# Altium PCB 2LED-ALUMBoard.PcbDoc
Units mm, origin at the board's own origin, x right, y up, seen from the top; angles counter-clockwise.
Board outline 35.1 x 49.8 mm, 2 copper layers (Top Layer, Bottom Layer); 6 components, 20 nets, 37 pads, 0 vias.
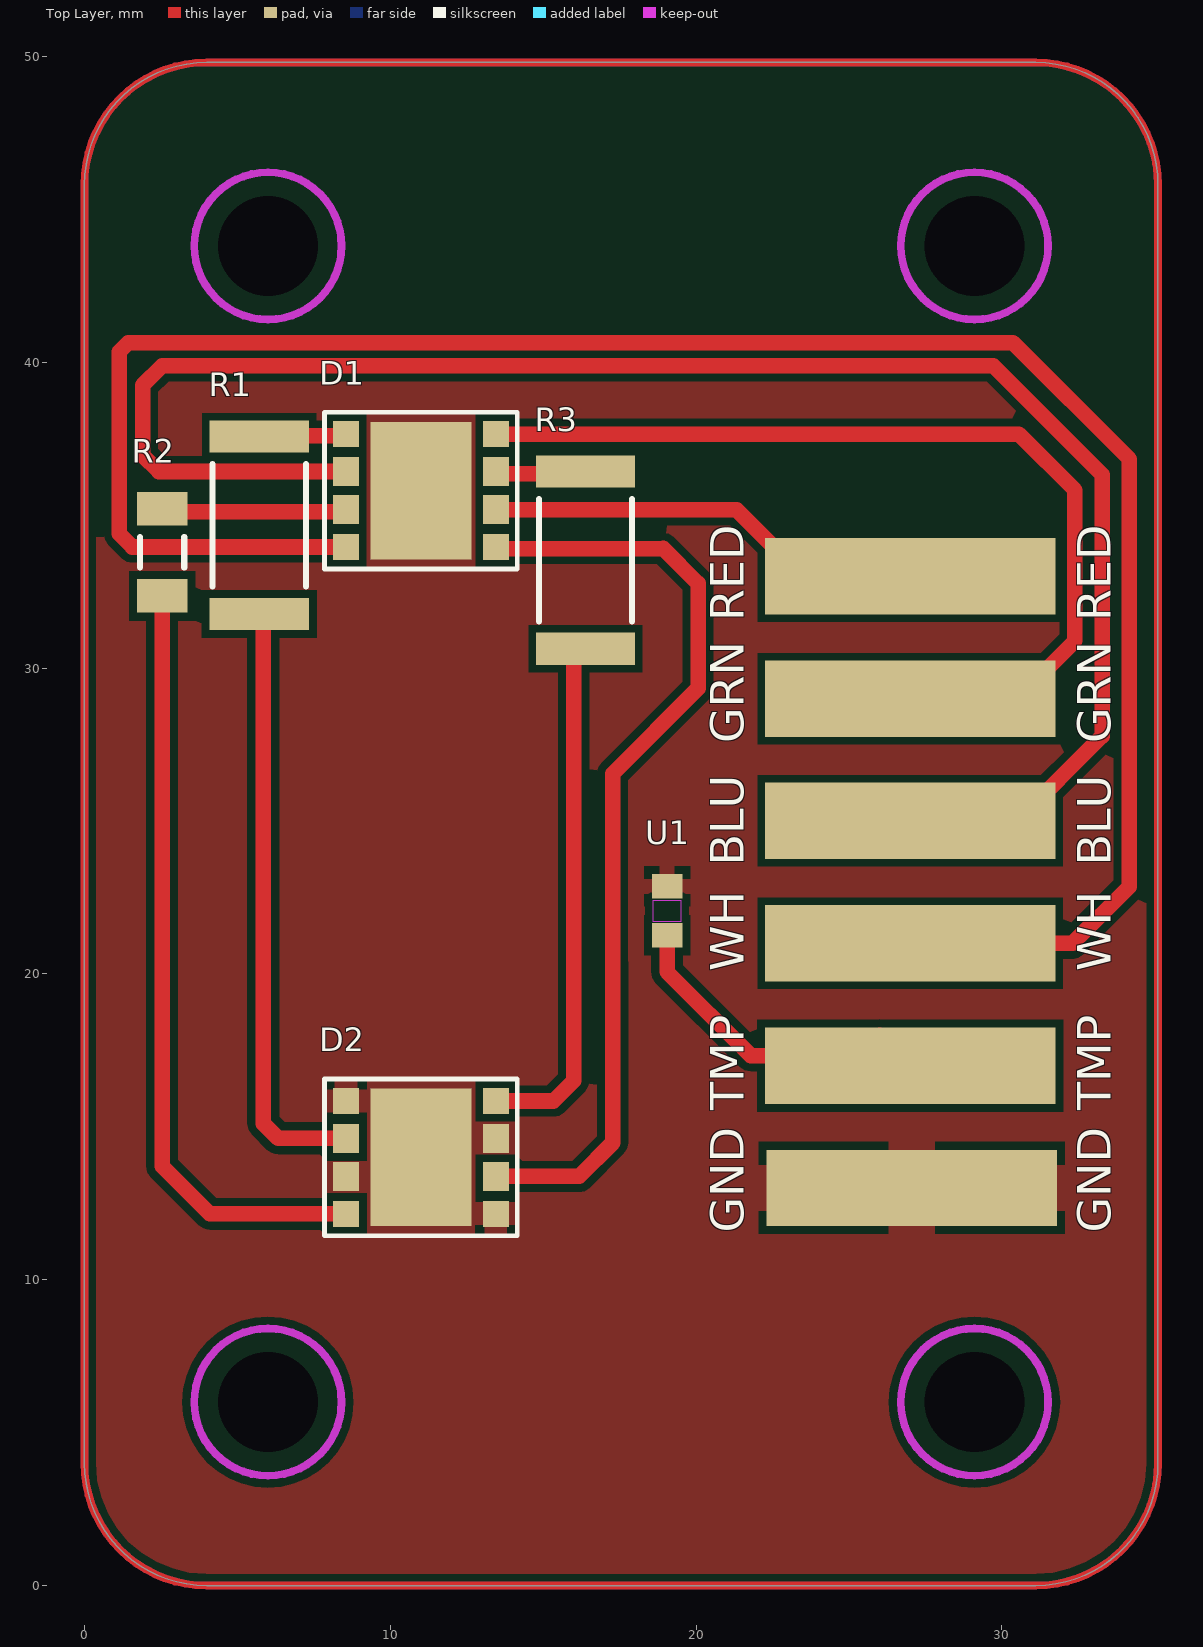
[diagram p0: Top Layer view]
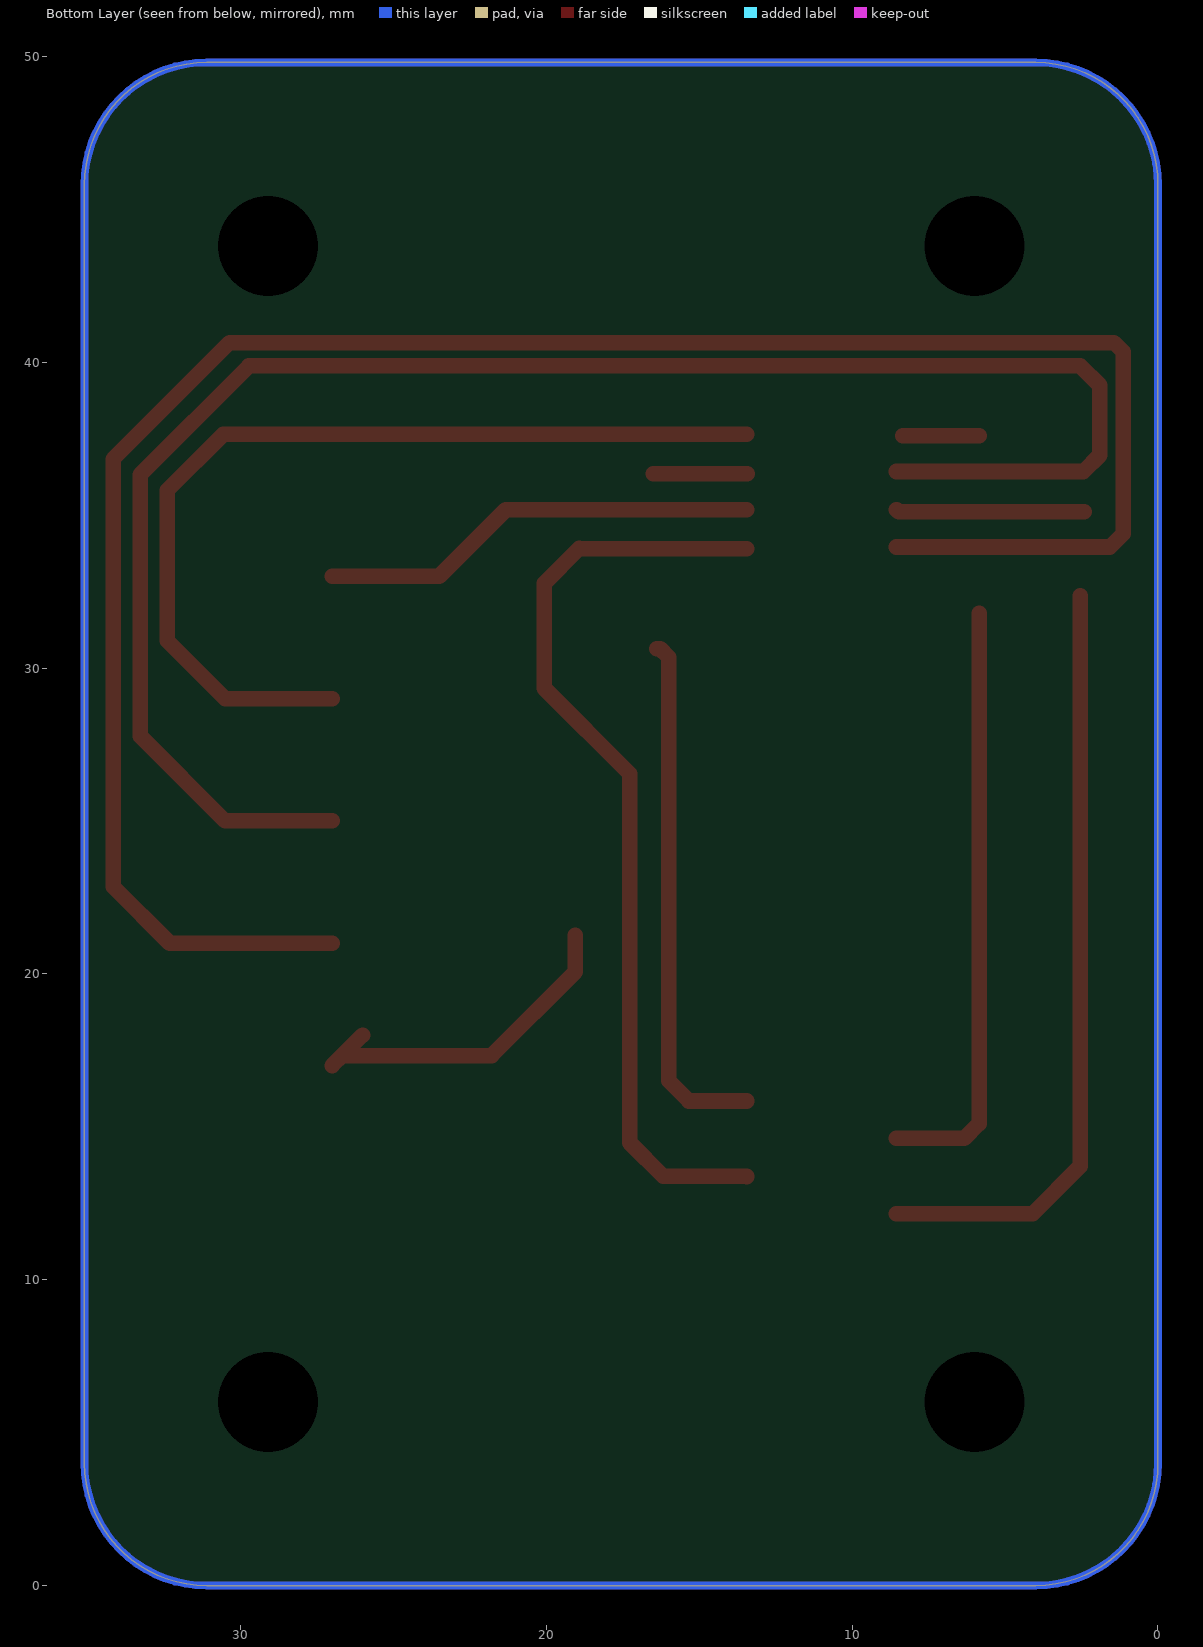
[diagram p1: Bottom Layer view, seen from below]
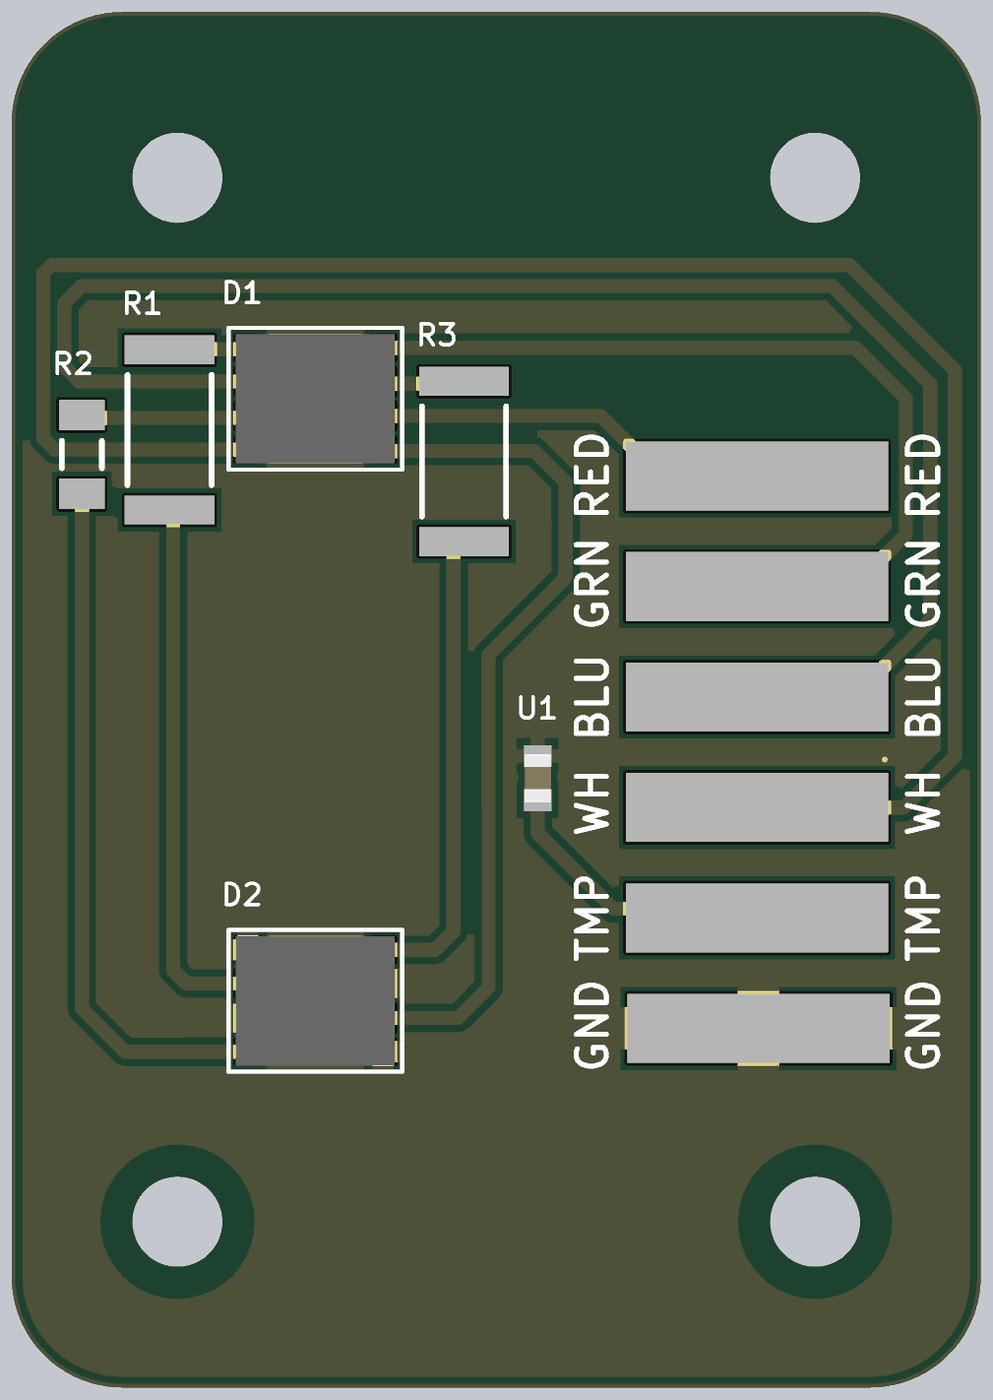
[diagram p2: 3D render of the assembled board from above, using the file's embedded part models]

## Layer stack, top to bottom
Top Solder: solder mask 0.0102, Solder Resist, Dk 3.5
Top Layer: signal copper 0.0356
Dielectric 1: dielectric 0.32, FR-4, Dk 4.8
Bottom Layer: signal copper 0.0356
Bottom Solder: solder mask 0.0102, Solder Resist, Dk 3.5

## Board outline
0,4 0,45.8 cw(c4,45.8) 4,49.8 31.1,49.8 cw(c31.1,45.8) 35.1,45.8 35.1,4 cw(c31.1,4) 31.1,0 4,0 cw(c4,4)

## Design rules (kind name [scope] priority, off if disabled: settings)
Clearance [All] p1: gap=0.254 ignorepadtopadclearanceinfootprint=FALSE
HoleSize [All] p1: absolutevalues=TRUE maxlimit=5.08 minlimit=0.025 maxpercent=80.000 minpercent=20.000
PolygonConnect [All] p1: connectstyle=Direct reliefconductorwidth=0.254 reliefentries=4 polygonreliefangle="90 Angle" airgapwidth=0.254
RoutingVias [All] p1: holewidth=0.711 width=1.27 viastyle="Through Hole" minholewidth=0.711 minwidth=1.27 maxholewidth=0.711 maxwidth=1.27
SilkToSolderMaskClearance [IsPad] p1: minsilkscreentomaskgap=0.191 clearancetoexposedcopper=TRUE
SolderMaskExpansion [All] p1: expansion=0.102 istentingtop=FALSE
SupplyNets "Schematic Supply Nets" [InNet('GND')] p1: voltage=0.000
Width [All] p1: maxlimit=0.762 minlimit=0.254 preferedwidth=0.508
28 further rules are at their usual default settings.

## Classes and differential pairs
component class LED_aluminum: D1 D2 R1 U1

## Components (designator, comment, footprint, x,y, rotation, side; value= is the part's Value field where it differs from the comment)
D1 "LE_RTDUW_S2WM" LE_RTDUW_S2WM 11,35.8 r270 top
D2 "LE_RTDUW_S2WM" LE_RTDUW_S2WM 11,14 r270 top
R1 "Jumper 2512(6432)" RESC2512(6432)_L#1 5.715,34.671 r90 top value="0.00 Ohm"
R2 "ERJ-8GEY0R00V" RESC3216X70X50NL05T20 2.54,33.782 r90 top
R3 "Jumper 2512(6432)" RESC2512(6432)_L#2 16.383,33.528 r270 top value="0.00 Ohm"
U1 "NTCS0603E3223FMT" NTCS0603_VIS 19.05,22.06 r90 top

## Footprints (in the part's own frame and the unit in brackets; to place one, negate y for a bottom-side part, rotate by r counter-clockwise, add the part's x,y. Pads: shape width x height; smd on the part's side, far side on the other; paste and mask are expansions set on the pad)
LE_RTDUW_S2WM [mil]
  rect 33.5x33.5 smd: 1(72.6,96.5) 4(-72.6,96.5) 5(-72.6,-96.5) 8(72.6,-96.5)
  rect 37.4x33.5 smd: 2(24.6,96.5) 3(-24.6,96.5) 6(-24.6,-96.5) 7(24.6,-96.5)
  rect 177.17x129.92 smd: 9(0,0)
  silkscreen extent -101,-124 101,124, body extent -92,-113 92,113, height 52
NTCS0603_VIS [mm]
  rect 0.8x1 smd paste+0 mask+0: 1(-0.8,0) 2(0.8,0)
  Top Layer keep-out region: -0.349,-0.449 -0.349,0.449 0.349,0.449 0.349,-0.449
  body extent -0.88,-0.47 0.88,0.47, height 0.94
RESC2512(6432)_L#1 [mm] "Chip Resistor, Body 6.4x3.2mm, IPC High Density"
  rect 1.05x3.25 smd: 2(-2.9,0) 2(2.9,0)
  silkscreen extent -2,-1.52 2,1.53, body extent -3.25,-1.7 3.25,1.7, height 0.75
RESC2512(6432)_L#2 [mm] "Chip Resistor, Body 6.4x3.2mm, IPC High Density"
  rect 1.05x3.25 smd: 1(-2.9,0) 2(2.9,0)
  silkscreen extent -2,-1.52 2,1.53, body extent -3.25,-1.7 3.25,1.7, height 0.75
RESC3216X70X50NL05T20 [mm] "Chip Resistor, 2-Leads, Body 3.20x1.60mm, IPC Medium Density"
  rect 1.1x1.65 smd: 1(-1.425,0) 2(1.425,0)
  silkscreen extent -0.5,-0.72 0.5,0.72, body extent -1.63,-0.82 1.62,0.82, height 0.7

## Part data
D1 D2: "LED OSTAR RGBW 625/527/453NM SMD", Supplier Part Number 1=720-LERTDUWS2WMA2120, Supplier 1=Mouser
R1: library part CMP-1018-00001-1, "Jumper 2512 (6432 Metric)", Case-EIA=2512, Case-Metric=6432, Power=None, Technology=SMT, Tolerance=None
R2: library part CMP-2003-00541-1, Manufacturer=Panasonic, Part Number=ERJ-8GEY0R00V
R3: library part CMP-2003-00541-1, Case-EIA=2512, Case-Metric=6432, Power=None, Technology=SMT, Tolerance=None
U1: library part CMP-00030-42631939-1, "NTCS0603E3223FMT Thermistor NTC 22K Ohm 1% 2-Pin 0603 Surface Mount Solder Pad 3730K -4.5 to -4 T/R Automotive", Case Code (Imperial)=0603, Case Code (Metric)=1608, Max Operating Temperature=150°C, Min Operating Temperature=-40°C, Power Dissipation=125mW, Resistance=22kΩ, Tolerance=1%, Accuracy=1%, Case/Package=0603, Contact Plating=Tin, Depth=800µm, Height=800µm, Length=1.6mm, Mount="Surface Mount", NexarPartId=42631939, Number of Pins=2, Power Rating=125mW, Radiation Hardening=No, REACH SVHC=Unknown, RoHS=Compliant, Schedule B="8533400080, 8533400080", Termination=SMD/SMT, Width=1.6mm

## Free pads (board coordinates)
  rect 9.5x2.5 smd: 2(27,17) 2(27,21) 2(27,25) 2(27,29) 2(27,33) 2(27.049,13)
  rrect50% 0x0 hole 3.264 unplated mask+0.102: 7(6,6) 7(6,43.8) 7(29.1,6) 7(29.1,43.8)
  rrect50% 0x0 all layers, no hole: 8(31.623,22.733)

## Nets (pads, with @x,y where several pads share a name; then routed paths per layer and width w, separated by ;. In a path a pad name is that pad's centre, name@x,y a point inside that pad or via, vN(x,y) a via of type N, cw(c..) or ccw(c..) an arc to the next point about the centre after c; other vN are vias at no path point)
"Blue Anode": D1.6 pad.2@27,25 | length 58.2
  Top Layer w0.508: D1.6 2.437,36.425 1.905,36.957 1.905,39.243 2.54,39.878 29.718,39.878 33.274,36.322 33.274,27.774 30.5,25 pad.2@27,25
"Blue D1D2": D2.6 R1.2@5.715,31.771 | length 19.6
  Top Layer w0.508: R1.2@5.842,31.792 5.849,31.785 5.849,15.106 6.331,14.624 D2.6
"Blue D2D3": 
GND: D1.9 D2.1 D2.3 D2.5 D2.7 D2.9 pad.2@27.049,13 U1.2
"Green Anode": D1.4 pad.2@27,29 | length 30.8
  Top Layer w0.508: D1.4 30.555,37.644 32.385,35.814 32.385,30.885 30.5,29 pad.2@27,29
"Green D1D2": D2.4 R3.2 | length 17.2
  Top Layer w0.508: D2.4 15.336,15.844 16.002,16.51 16.002,30.357 16.273,30.628 R3.2
"Green D2D3": 
NetD1_1: D1.5 R1.2@5.715,37.571 | length 2.5
  Top Layer w0.508: R1.2@5.845,37.589 D1.5@8.351,37.589
NetD1_3: D1.3 R3.1 | length 3.1
  Top Layer w0.508: D1.3@13.422,36.346 13.449,36.346 R3.1@16.507,36.346
NetD1_7: D1.7 R2.2 | length 6.2
  Top Layer w0.508: R2.2@2.413,35.108 8.482,35.108 D1.7
NetD2_1: 
NetD2_3: 
NetD2_7: 
"Red Anode": D1.2 pad.2@27,33 | length 14.4
  Top Layer w0.508: D1.2 21.325,35.175 23.5,33 pad.2@27,33
"Red D1D2": D1.1 D2.2 | length 30.8
  Top Layer w0.508: D2.2 16.17,13.376 17.272,14.479 17.267,26.537 20.065,29.338 20.064,32.768 18.923,33.908 D1.1@13.451,33.905
"Red D2D3": 
Temp: pad.2@27,17 U1.1 | length 11.4
  Top Layer w0.508: U1.1 19.05,20.066 21.786,17.33 pad.2@26.67,17.33 ; pad.2@26.004,17.996 pad.2@26.67,17.33 ; pad.2@27,17 pad.2@26.67,17.33
"White Anode": D1.8 pad.2@27,21 | length 70.2
  Top Layer w0.508: D1.8 1.571,33.956 1.143,34.384 1.143,40.342 1.441,40.64 30.353,40.64 34.163,36.83 34.163,22.855 32.308,21 pad.2@27,21
"White D1D2": D2.8 R2.1 | length 25.3
  Top Layer w0.508: R2.1 2.54,13.716 4.102,12.154 D2.8
"White D2D3": 

## Polygon pours and split planes (outlines as drawn)
GND on Top Layer "GND_L01_P000" (solid, remove dead copper, pour order 0): 0,0 35.56,0 35.433,0.127 35.433,49.8 0,49.8

## Keep-outs
Top Layer:
  circle w0.254: c29.1,6 r2.408
  circle w0.254: c6,6 r2.408
  circle w0.254: c29.1,43.8 r2.408
  circle w0.254: c6,43.8 r2.408

## Other copper
Multi-Layer:
  the board outline again, w0.254

## Silkscreen, mask and mechanical layers (free items; w line width, h text height)
Top Overlay:
  text "RED" at 21.55,31.534 h1.1 r90
  text "RED" at 33.55,31.534 h1.1 r90
  text "GRN" at 21.55,27.534 h1.1 r90
  text "GRN" at 33.55,27.534 h1.1 r90
  text "BLU" at 21.55,23.534 h1.1 r90
  text "BLU" at 33.55,23.534 h1.1 r90
  text "WH" at 21.55,20.084 h1.1 r90
  text "WH" at 33.55,20.084 h1.1 r90
  text "TMP" at 21.55,15.534 h1.1 r90
  text "TMP" at 33.55,15.534 h1.1 r90
  text "GND" at 21.55,11.534 h1.1 r90
  text "GND" at 33.55,11.534 h1.1 r90
Top Solder:
  lines w0.3: 6,5.65 6,6.35 ; 6,43.45 6,44.15 ; 29.1,5.65 29.1,6.35 ; 29.1,43.45 29.1,44.15
Bottom Solder:
  region: 5.85,5.575 5.85,6.425 cw(c5.925,6.425) 5.925,6.5 6.075,6.5 cw(c6.075,6.425) 6.15,6.425 6.15,5.575 cw(c6.075,5.575) 6.075,5.5 5.925,5.5 cw(c5.925,5.575)
  region: 28.95,5.575 28.95,6.425 cw(c29.025,6.425) 29.025,6.5 29.175,6.5 cw(c29.175,6.425) 29.25,6.425 29.25,5.575 cw(c29.175,5.575) 29.175,5.5 29.025,5.5 cw(c29.025,5.575)
  region: 5.85,43.375 5.85,44.225 cw(c5.925,44.225) 5.925,44.3 6.075,44.3 cw(c6.075,44.225) 6.15,44.225 6.15,43.375 cw(c6.075,43.375) 6.075,43.3 5.925,43.3 cw(c5.925,43.375)
  region: 28.95,43.375 28.95,44.225 cw(c29.025,44.225) 29.025,44.3 29.175,44.3 cw(c29.175,44.225) 29.25,44.225 29.25,43.375 cw(c29.175,43.375) 29.175,43.3 29.025,43.3 cw(c29.025,43.375)